# Altium PCB AMP_V1.1.PcbDoc
Units mil, origin at the board's own origin, x right, y up, seen from the top; angles counter-clockwise.
Board outline 3630 x 2630 mil, 4 copper layers (Top Layer, Layer 1, Layer 2, Bottom Layer), stack 22.378 mil thick; 118 components, 78 nets, 320 pads, 437 vias.
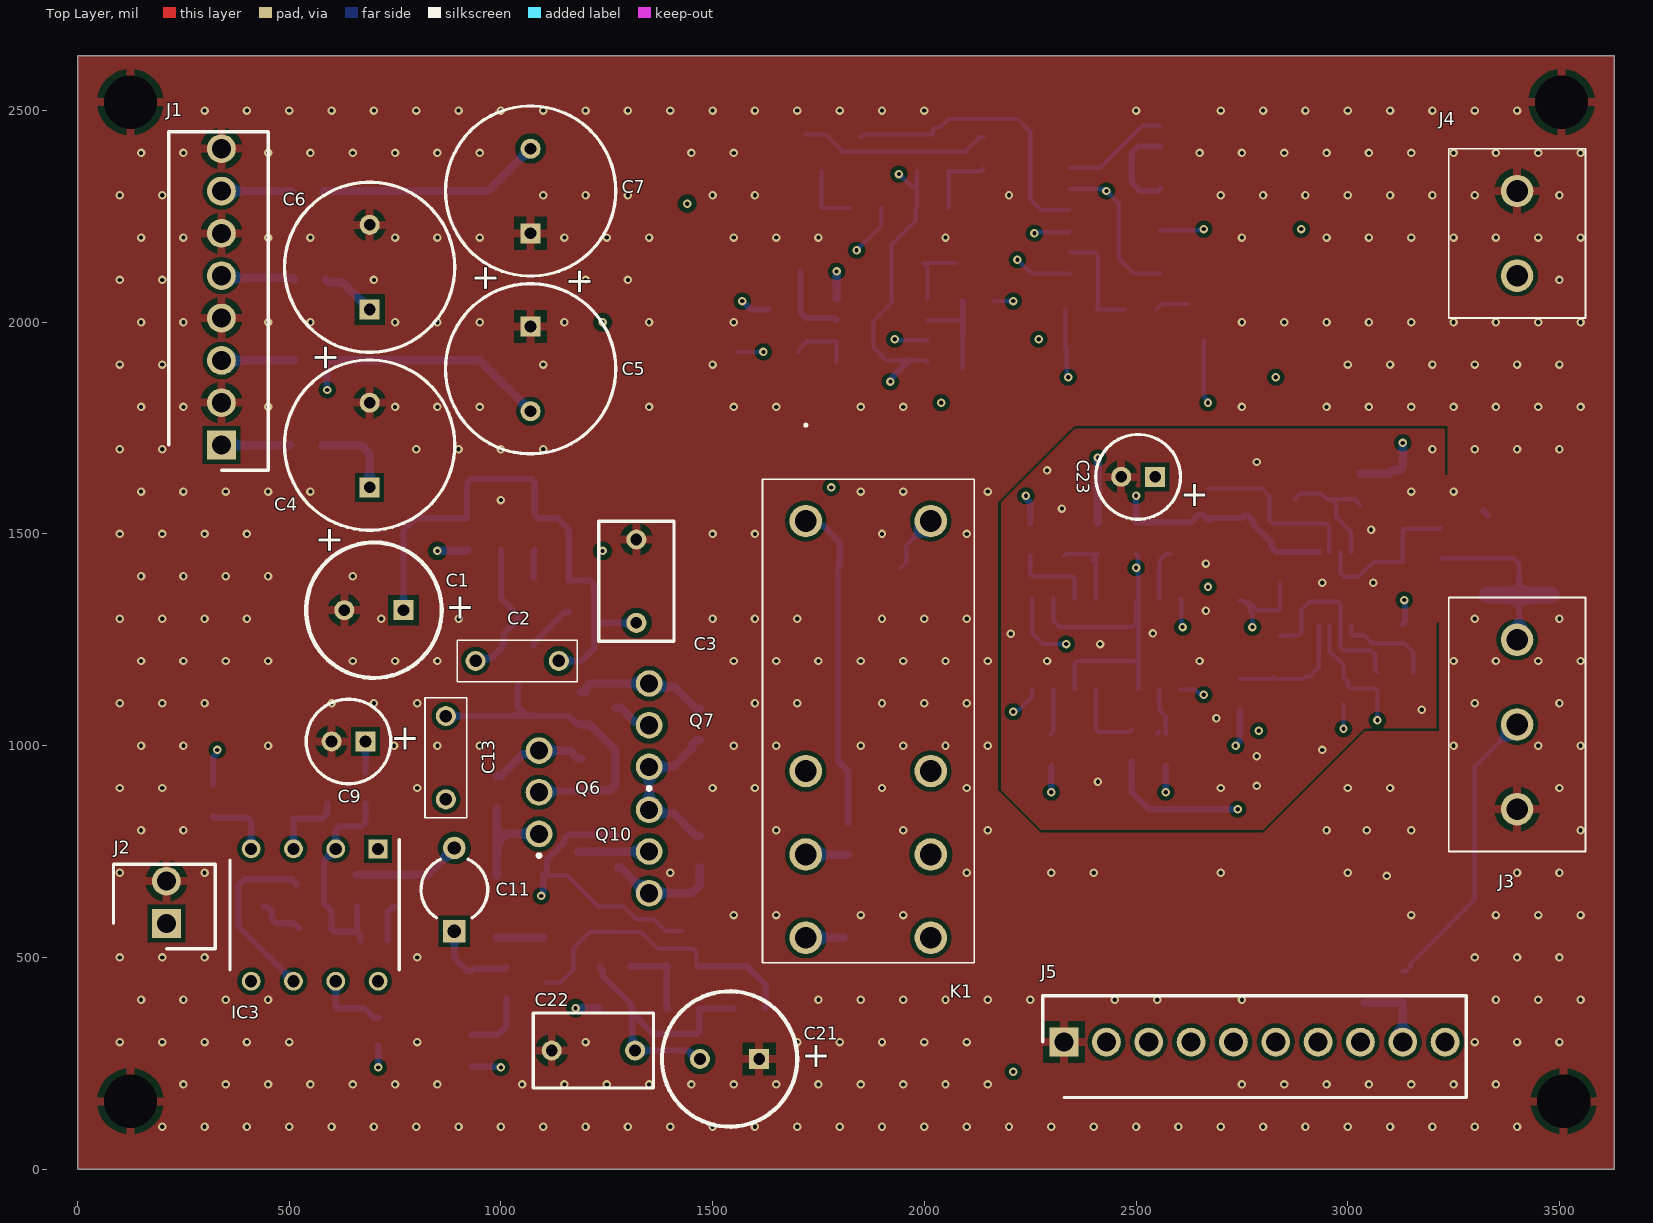
[diagram p0: Top Layer view]
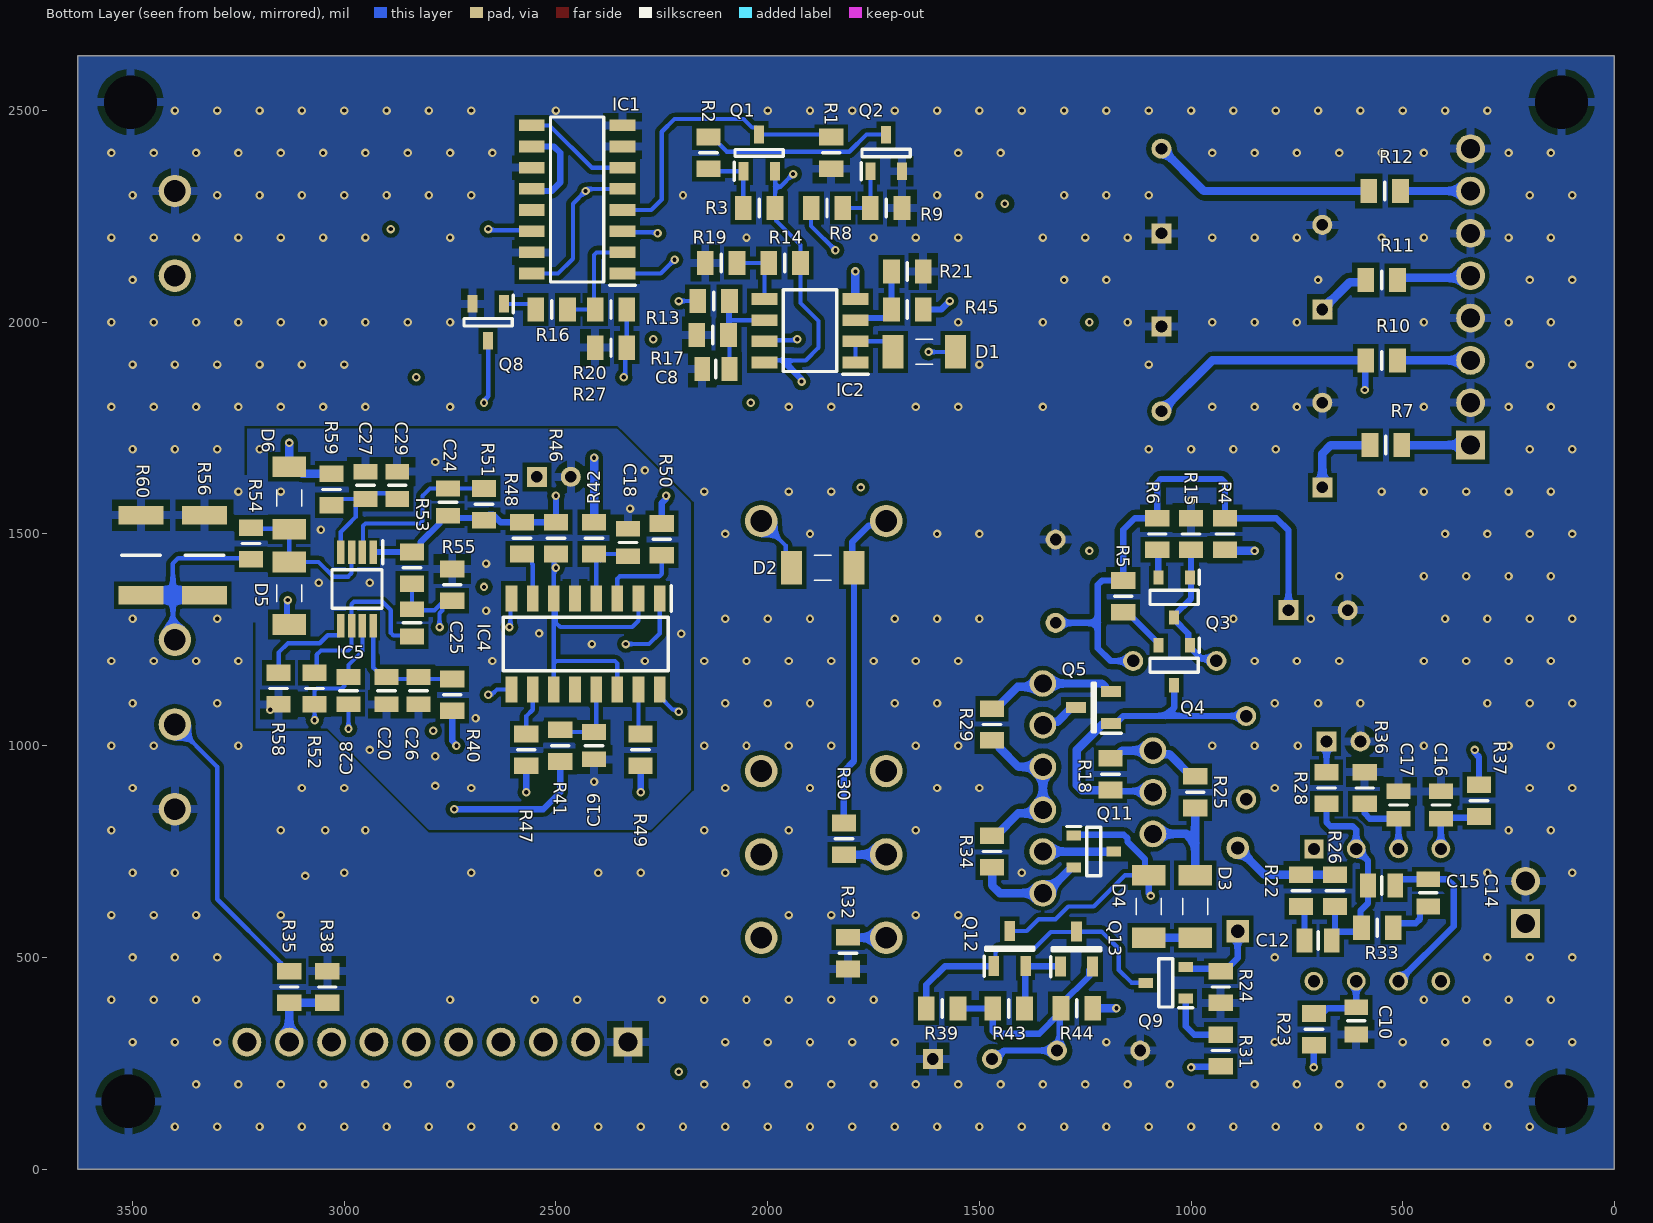
[diagram p1: Bottom Layer view, seen from below]
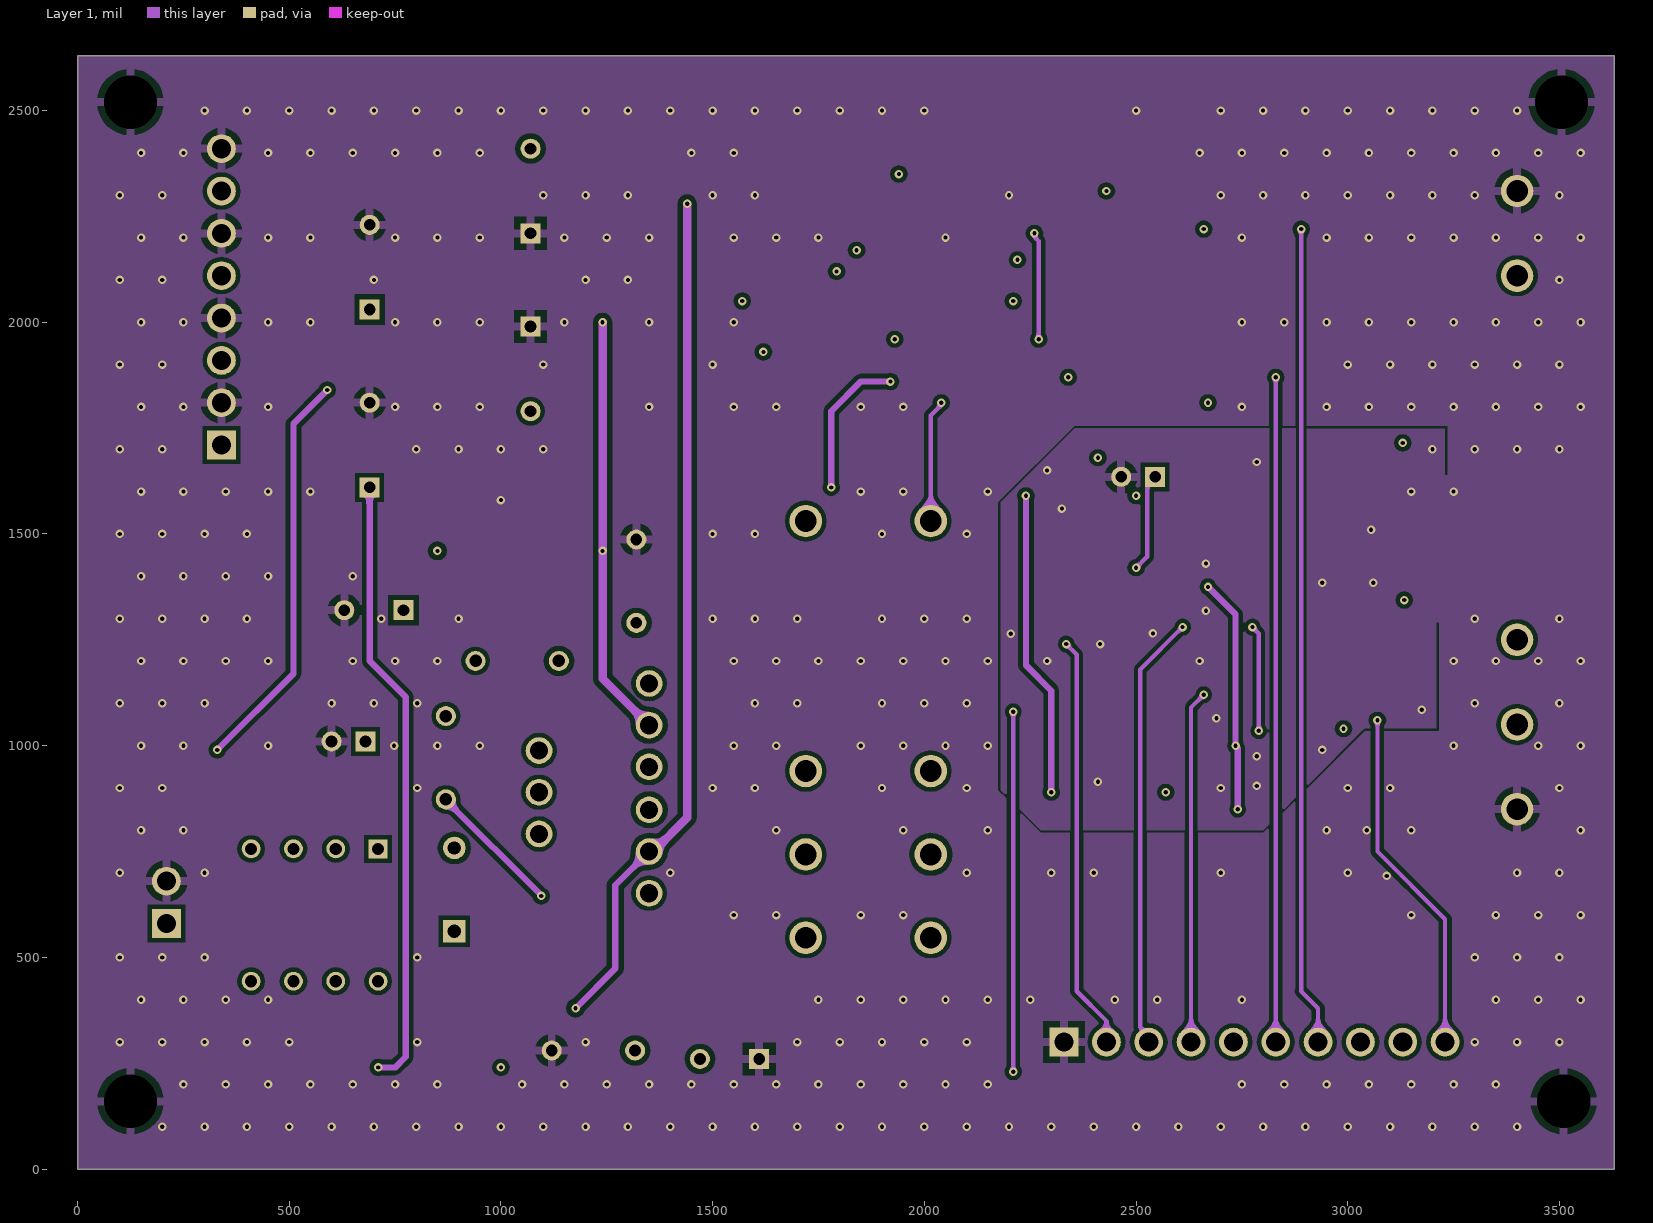
[diagram p2: Layer 1]
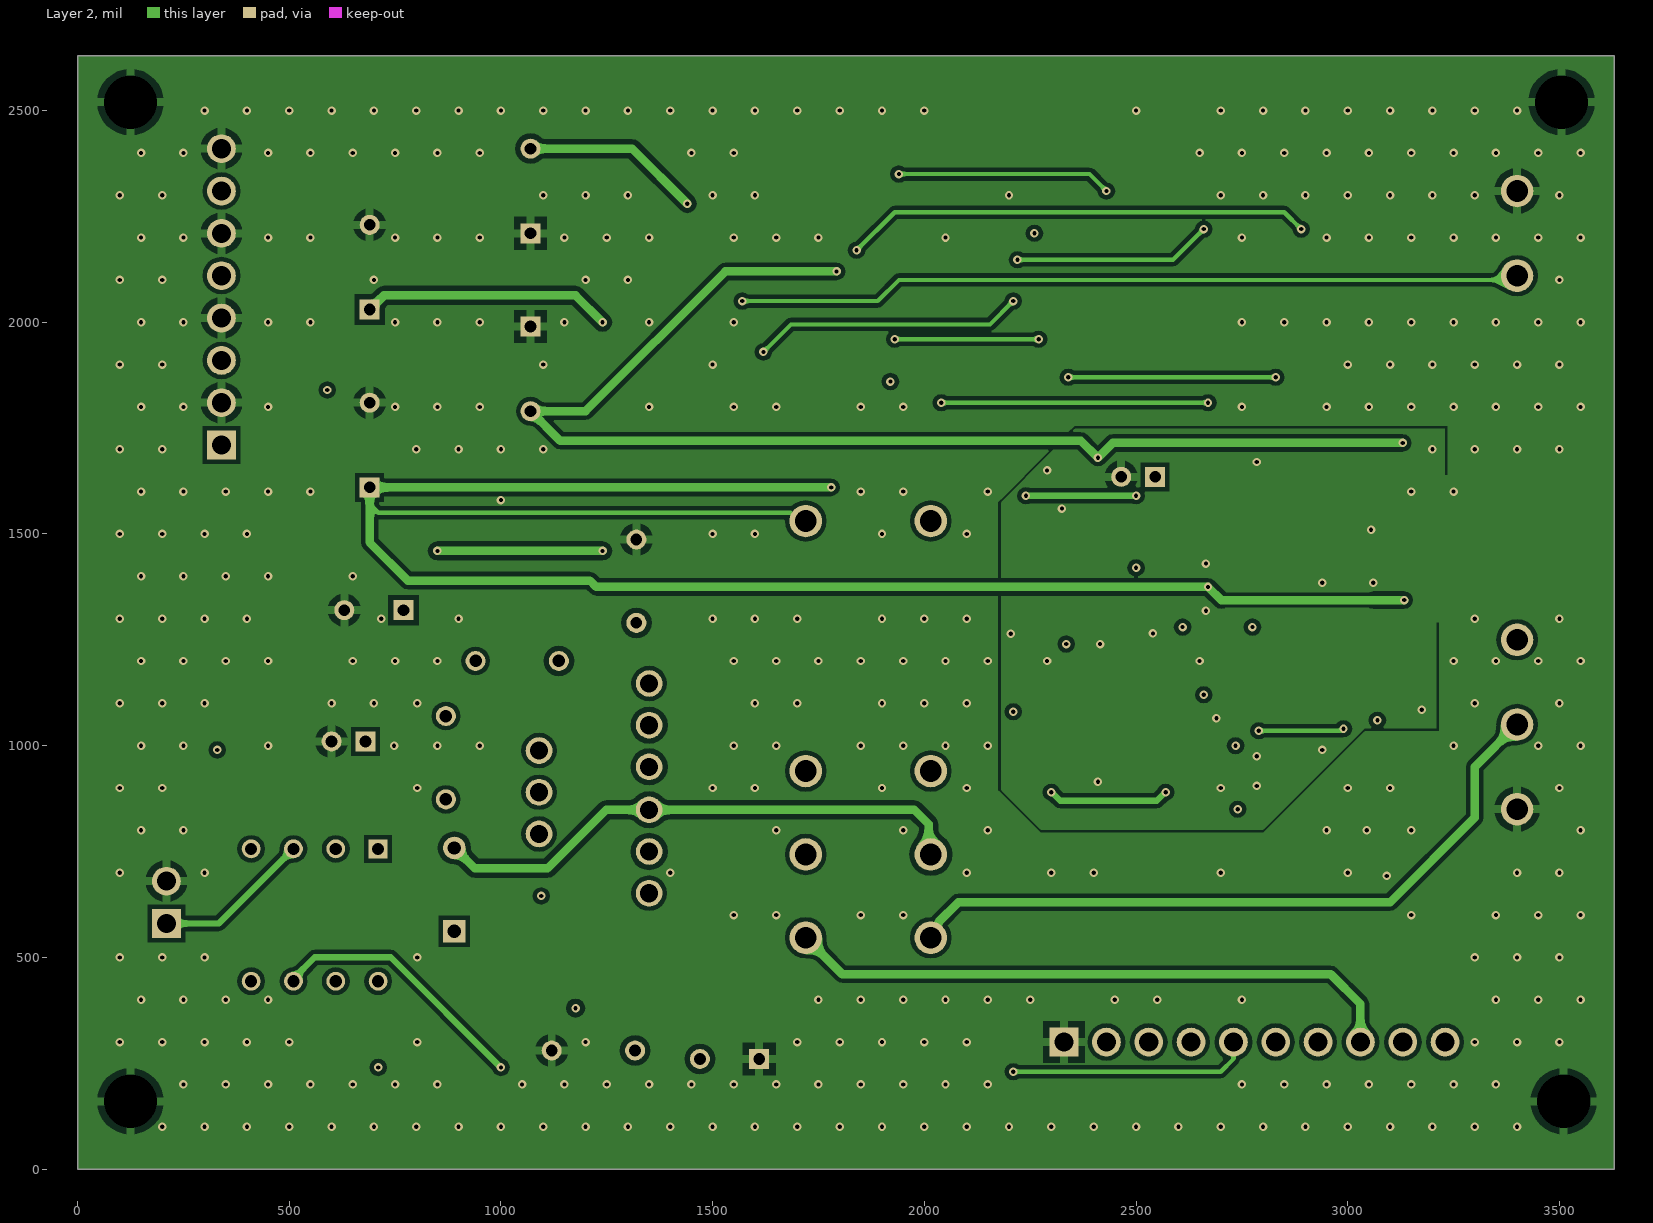
[diagram p3: Layer 2]
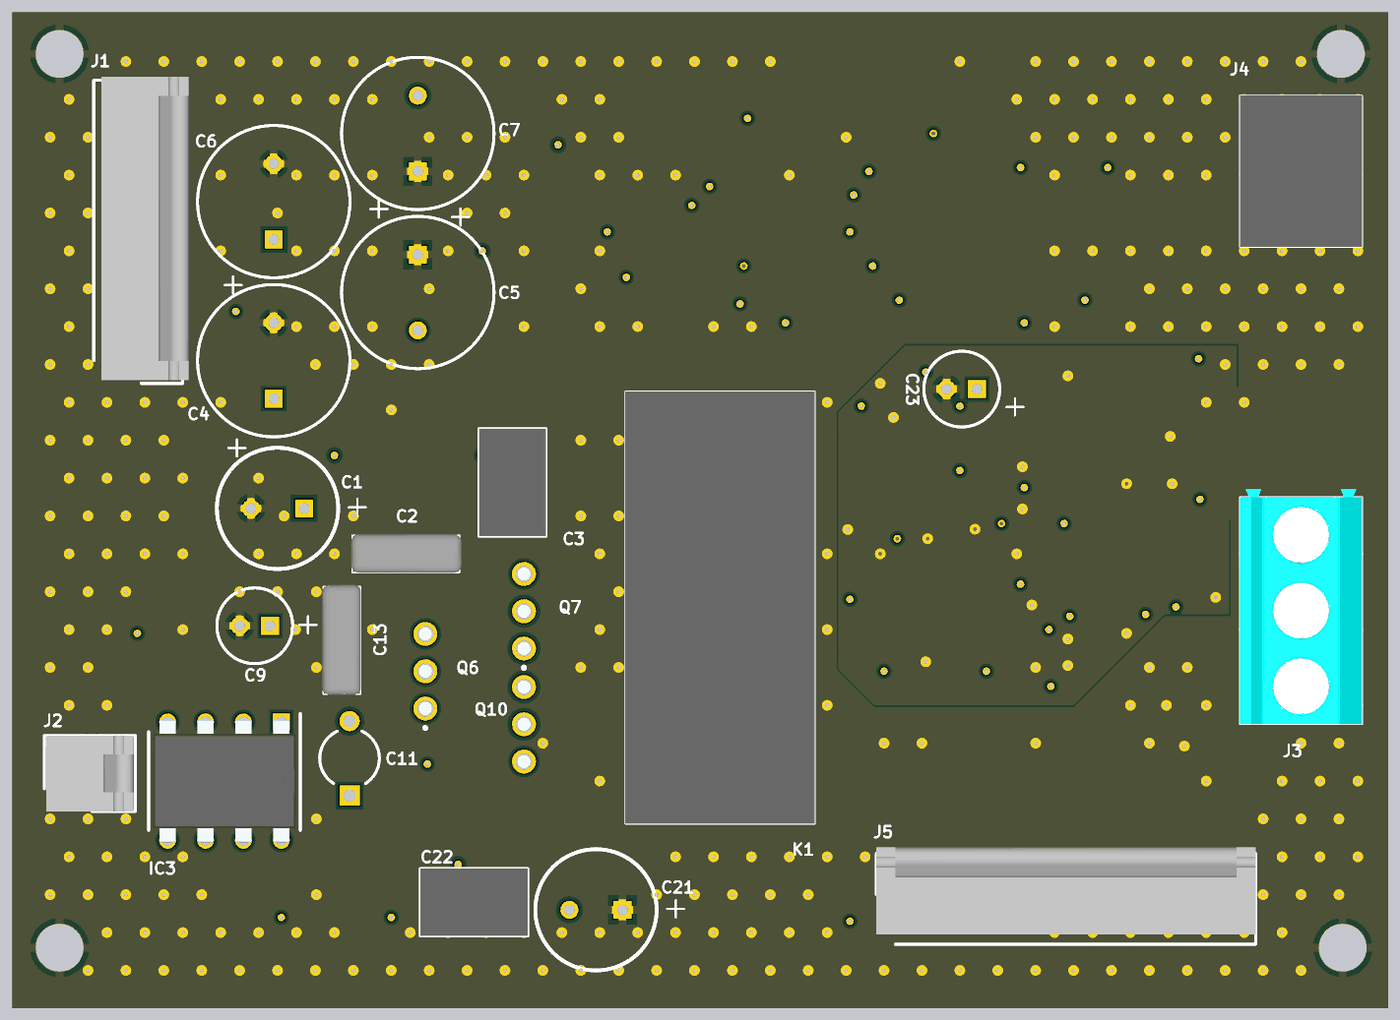
[diagram p4: 3D render of the assembled board from above, using the file's embedded part models]
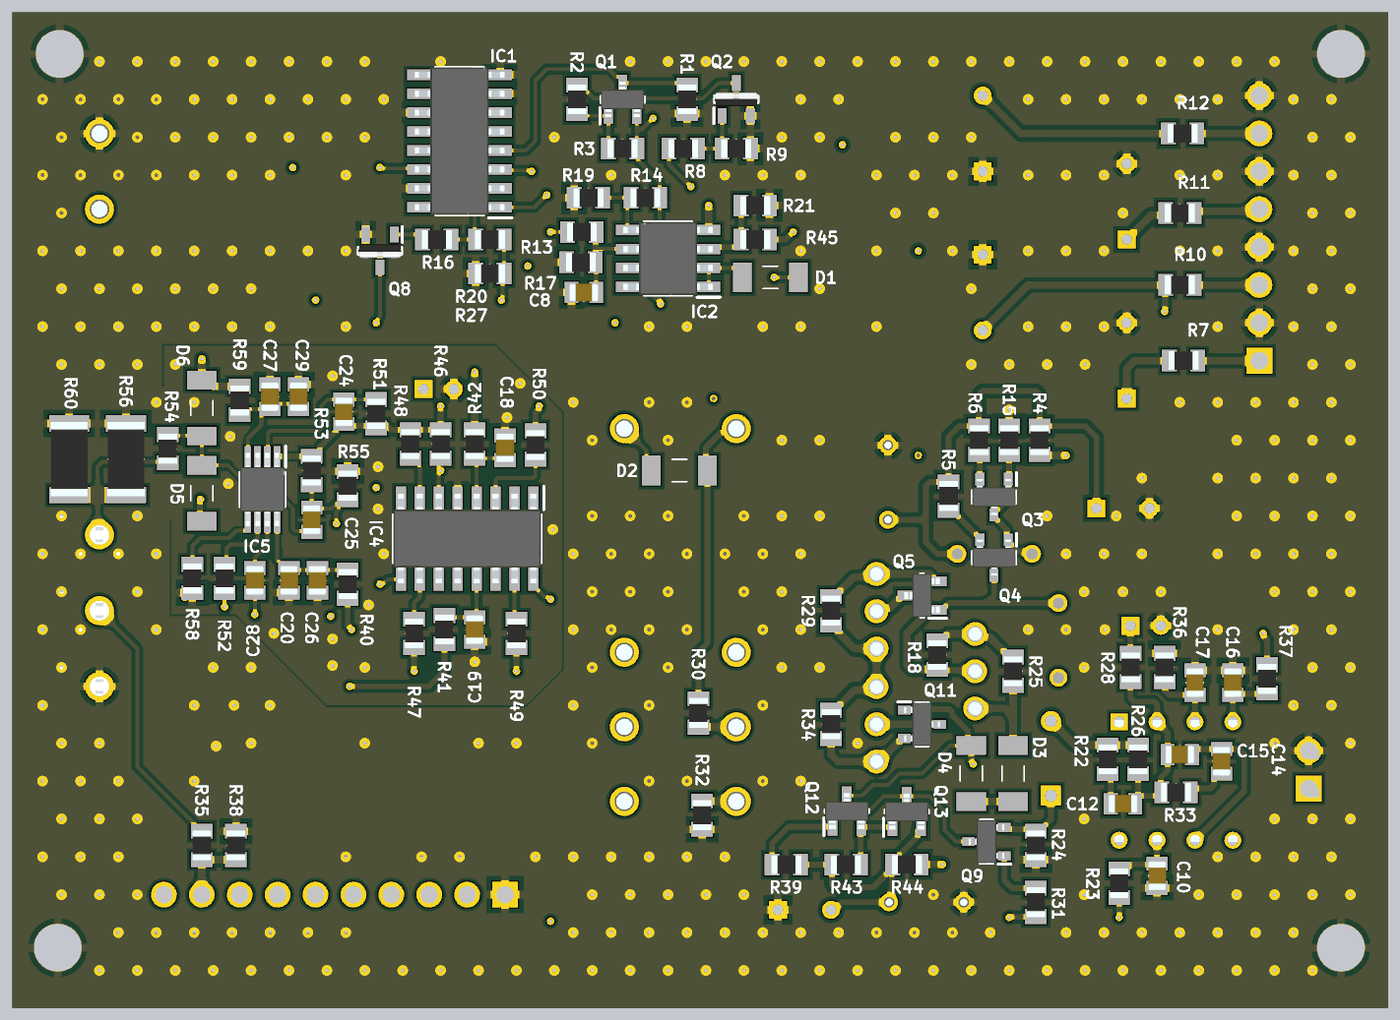
[diagram p5: 3D render of the assembled board from below, using the file's embedded part models]

## Layer stack, top to bottom
Top Solder: solder mask 0.4, Solder Resist, Dk 3.5
Top Layer: signal copper 1.4
Dielectric 2: prepreg 2.8, PP-006, Dk 4.1
Layer 1: signal copper 0.689
Dielectric 1: dielectric 12.6, FR-4, Dk 4.8
Layer 2: signal copper 0.689
Dielectric 3: prepreg 2.8, PP-006, Dk 4.1
Bottom Layer: signal copper 1.4
Bottom Solder: solder mask 0.4, Solder Resist, Dk 3.5

## Board outline
0,0 3630,0 3630,2630 0,2630

## Design rules (kind name [scope] priority, off if disabled: settings)
Clearance Clearance_Room_IC5 [TouchesRoom('Room_IC5')] p1: gap=7 ignorepadtopadclearanceinfootprint=FALSE
Clearance Clearance_HiVoltage [InNetClass('HiVoltage')] p2: gap=12 ignorepadtopadclearanceinfootprint=FALSE
Clearance [All] p3: gap=10 ignorepadtopadclearanceinfootprint=FALSE except(0: Arc-Hole Track-Hole SMDPad-Hole THPad-Hole Via-Hole Fill-Hole Poly-Hole Region-Hole Text-Hole)
ComponentClearance [All] p1 off: gap=10 collisioncheckmode=3 verticalgap=10 showdistances=FALSE
PlaneConnect PlaneConnect_GND [InNet('GND')] p1: pad.planeconnectstyle=Relief pad.reliefexpansion=20 pad.reliefentries=4 pad.reliefconductorwidth=10 pad.reliefairgap=10 via.planeconnectstyle=Direct via.reliefexpansion=20 via.reliefentries=4 via.reliefconductorwidth=10 via.reliefairgap=10
PlaneConnect [All] p2: planeconnectstyle=Relief reliefexpansion=20 reliefentries=4 reliefconductorwidth=10 reliefairgap=10
PolygonConnect PolygonConnect_GND [All] p1: thpad.connectstyle=Relief thpad.reliefconductorwidth=20 thpad.reliefentries=4 thpad.polygonreliefangle="90 Angle" thpad.airgapwidth=15 smdpad.connectstyle=Relief smdpad.reliefconductorwidth=20 smdpad.reliefentries=4 smdpad.polygonreliefangle="90 Angle" smdpad.airgapwidth=15 via.connectstyle=Direct via.reliefconductorwidth=20 via.reliefentries=4 via.polygonreliefangle="90 Angle" via.airgapwidth=15
PolygonConnect [All] p2: connectstyle=Relief reliefconductorwidth=20 reliefentries=4 polygonreliefangle="90 Angle" airgapwidth=15
RoomDefinition Room_IC5 [False] p1: confinementstyle=ConfineIn formatcopy=TRUE lockcomponents=FALSE outline 2880,1520 3060,1520 3060,1210 2880,1210
RoutingVias [All] p1: holewidth=20 width=40 viastyle="Through Hole" minholewidth=7.87 minwidth=15.75 maxholewidth=28 maxwidth=50
SolderMaskExpansion [All] p1: expansion=4 istentingtop=FALSE
Width [All] p1: maxlimit=100 minlimit=10 preferedwidth=20
28 further rules are at their usual default settings.

## Classes and differential pairs
net class HiVoltage: +50 -50 NetC1_1 NetC11_2 NetC21_2 NetK1_12 NetK1_22

## Components (designator, comment, footprint, x,y, rotation, side; value= is the part's Value field where it differs from the comment)
C1 "Capacitor Electrolytic" CAP_EL_8X12R3_5 700,1320 r0 top value=10u
C2 "Capacitor Film" R82EC2470DQ60J 940,1200 r0 top value=220n
C3 "Capacitor Film" R82DC3680AA60J 1320,1486.85 r270 top value=680n
C4 "Capacitor Electrolytic" CAP_EL_10X16XR5 690,1710 r270 top value=100u
C5 "Capacitor Electrolytic" CAP_EL_10X16XR5 1070,1890 r90 top value=100u
C6 "Capacitor Electrolytic" CAP_EL_10X16XR5 690,2130 r270 top value=220u
C7 "Capacitor Electrolytic" CAP_EL_10X16XR5 1070,2310 r270 top value=220u
C8 "Capacitor SMD" CAPC2012X140N 2122.28,1890 r0 bottom value=10n
C9 "Capacitor Electrolytic" CAP_EL_5X7XR2 640,1010 r0 top value=10u
C10 "Capacitor_SMD" CAPC2012X140N 610,350 r270 bottom value=100n
C11 "Cap2" CAPR5-4X5 890,660 r90 top value=4p
C12 "Capacitor_SMD" CAPC2012X140N 700,540 r0 bottom value=100p
C13 "Cap Polyester THT" R82EC2470DQ60J 870,873.15 r90 top value=680n
C14 "Capacitor_SMD" CAPC2012X140N 440,652.28 r90 bottom value=1n
C15 "Capacitor_SMD" CAPC2012X140N 550,670 r180 bottom value=10p
C16 "Capacitor_SMD" CAPC2012X140N 410,860 r270 bottom value=100n
C17 "Capacitor_SMD" CAPC2012X140N 510,860 r270 bottom value=10p
C18 "Capacitor_SMD" CAPC2012X140N 2330,1480 r90 bottom value=100n
C19 "Capacitor_SMD" CAPC2012X140N 2410,1000 r270 bottom value=100n
C20 "Capacitor_SMD" CAPC2012X140N 2900,1130 r270 bottom value=100n
C21 "Capacitor Electrolytic" CAP_EL_8X12R3_5 1540,260 r0 top value=10u
C22 "Capacitor Film" R82DC3680AA60J 1120,280 r0 top value=680n
C23 "Capacitor Electrolytic" CAP_EL_5X7XR2 2505,1635 r0 top value=10u
C24 "Capacitor SMD" CAPC2012X140N 2755,1575 r270 bottom value=10n
C25 "Capacitor SMD" CAPC2012X140N 2840,1290 r90 bottom value=10n
C26 "Capacitor_SMD" CAPC2012X140N 2825,1130 r270 bottom value=10u
C27 "Capacitor_SMD" CAPC2012X140N 2950,1615 r90 bottom value=100n
C28 "Capacitor SMD" CAPC2012X140N 2990,1130 r270 bottom value=10n
C29 "Capacitor_SMD" CAPC2012X140N 2875,1615 r90 bottom value=10u
D1 "1N4148BUR" 1N4148BUR 1630,1930 r0 bottom
D2 "1N4148BUR" 1N4148BUR 1870,1420 r0 bottom
D3 "1N4148BUR" 1N4148BUR 990,620 r90 bottom
D4 "1N4148BUR" 1N4148BUR 1100,620 r270 bottom
D5 "1N4148BUR" 1N4148BUR 3130,1360 r90 bottom
D6 "1N4148BUR" 1N4148BUR 3130,1585 r90 bottom
IC1 "HEF4043BT,652" SOIC127P600X175-16N 2450,2290 r0 bottom
IC2 "LM258AWYPT" SOIC127P600X175-8N 1900,1980 r0 bottom
IC3 "LM741CN_NOPB" DIP794W53P254L959H508Q8N 560,600 r270 top
IC4 "DG442DY-E3" SOIC127P600X175-16N 2430,1240 r270 bottom
IC5 "AZ4580" SOP65P490X110-8N 2970,1370 r270 bottom
J1 "640456-8" SHDR8W66P0X254_1X8_2032X572X1024P 340,1710 r270 top
J2 "640456-2" SHDR2W66P0X254_1X2_508X572X1041P 210,580 r270 top
J3 "Terminal Block" TB00650803BE 3400,850 r90 top
J4 "TB006-508-02BE" TB00650802BE 3400,2210 r90 top
J5 "1-640456-0" SHDR10W66P0X254_1X10_2540X572X1041P 2330,300 r0 top
K1 "RM84-2012-35-1005" RM842012351005 1720,1530.55 r90 top
Q1 "BC856A-T" SOT95P240X115-3N 2020,2400 r90 bottom
Q2 "BC846" SOT95P230X110-3N 1720,2400 r90 bottom
Q3 "MMBT5401-7-F" SOT95P240X120-3N 1040,1350 r270 bottom
Q4 "MMBT5401-7-F" SOT95P240X120-3N 1040,1190 r270 bottom
Q5 "MMBT5551-7-F" SOT96P240X110-3N 1230,1090 r0 bottom
Q6 "BF422-AP" BF422AP 1090,791.57 r90 top
Q7 "BF422-AP" BF422AP 1350,950 r90 top
Q8 "BC846" SOT95P230X110-3N 2660,2000 r270 bottom
Q9 "MMBT5401-7-F" SOT95P240X120-3N 1060,440 r0 bottom
Q10 "BF423-AP" BF422AP 1350,848.43 r270 top
Q11 "MMBT5401-7-F" SOT95P240X120-3N 1230,750 r180 bottom
Q12 "MMBT5551-7-F" SOT96P240X110-3N 1428.42,520.72 r90 bottom
Q13 "MMBT5551-7-F" SOT96P240X110-3N 1270.62,519.38 r90 bottom
R1 "Res_SMD" RESC2012X60N 1850,2400 r90 bottom value=1k
R2 "Res_SMD" RESC2012X60N 2140,2400 r270 bottom value=1k
R3 "Res_SMD" RESC2012X60N 2020,2270 r180 bottom value=1k
R4 "Res_SMD" RESC2012X60N 920,1500 r90 bottom value=1k
R5 "Res_SMD" RESC2012X60N 1160,1352.6 r90 bottom value=1k
R6 "Res_SMD" RESC2012X60N 1080,1500 r90 bottom value=1k
R7 "Res_SMD" RESC2012X60N 540,1710 r180 bottom value=1k
R8 "Res_SMD" RESC2012X60N 1860,2270 r180 bottom value=1k
R9 "Res_SMD" RESC2012X60N 1720,2270 r180 bottom value=1k
R10 "Res_SMD" RESC2012X60N 550,1910 r180 bottom value=1k
R11 "Res_SMD" RESC2012X60N 550,2100 r180 bottom value=1k
R12 "Res_SMD" RESC2012X60N 542.6,2310 r180 bottom value=1k
R13 "Res_SMD" RESC2012X60N 2127.4,2050 r180 bottom value=1k
R14 "Res_SMD" RESC2012X60N 1960,2140 r0 bottom value=1k
R15 "Res_SMD" RESC2012X60N 1000,1500 r270 bottom value=1k
R16 "Res_SMD" RESC2012X60N 2510,2030 r180 bottom value=1k
R17 "Res_SMD" RESC2012X60N 2130,1970 r0 bottom value=1k
R18 "Res_SMD" RESC2012X60N 1190,932.6 r270 bottom value=1k
R19 "Res_SMD" RESC2012X60N 2110,2140 r0 bottom value=1k
R20 "Res_SMD" RESC2012X60N 2370,2030 r0 bottom value=1k
R21 "Res_SMD" RESC2012X60N 1670,2120 r180 bottom value=1k
R22 "Res_SMD" RESC2012X60N 740,657.4 r90 bottom value=1k
R23 "Res_SMD" RESC2012X60N 710,330 r270 bottom value=1k
R24 "Res_SMD" RESC2012X60N 930,430 r270 bottom value=1k
R25 "Res_SMD" RESC2012X60N 990,890 r90 bottom value=1k
R26 "Res_SMD" RESC2012X60N 660,657.4 r90 bottom value=1k
R27 "Res_SMD" RESC2012X60N 2370,1940 r180 bottom value=1k
R28 "Res_SMD" RESC2012X60N 680,900 r90 bottom value=1k
R29 "Res_SMD" RESC2012X60N 1470,1050 r90 bottom value=1k
R30 "Res_SMD" RESC2012X60N 1820,780 r270 bottom value=1k
R31 "Res_SMD" RESC2012X60N 930,280 r270 bottom value=1k
R32 "Res_SMD" RESC2012X60N 1810,510 r270 bottom value=1k
R33 "Res_SMD" RESC2012X60N 560,570 r0 bottom value=1k
R34 "Res_SMD" RESC2012X60N 1470,750 r90 bottom value=1k
R35 "Res_SMD" RESC2012X60N 3130,430 r270 bottom value=1k
R36 "Res_SMD" RESC2012X60N 590,900 r270 bottom value=1k
R37 "Res_SMD" RESC2012X60N 320,870 r270 bottom value=1k
R38 "Res_SMD" RESC2012X60N 3040,430 r90 bottom value=1k
R39 "Res_SMD" RESC2012X60N 1588.02,379.38 r0 bottom value=1k
R40 "Res_SMD" RESC2012X60N 2745,1120 r90 bottom value=1k
R41 "Res_SMD" RESC2012X60N 2490,1000 r270 bottom value=1k
R42 "Res_SMD" RESC2012X60N 2410,1490 r90 bottom value=1k
R43 "Res_SMD" RESC2012X60N 1430.62,379.38 r180 bottom value=1k
R44 "Res_SMD" RESC2012X60N 1270,380 r0 bottom value=1k
R45 "Res_SMD" RESC2012X60N 1670,2030 r180 bottom value=1k
R46 "Res_SMD" RESC2012X60N 2500,1490 r90 bottom value=1k
R47 "Res_SMD" RESC2012X60N 2570,990 r270 bottom value=1k
R48 "Res_SMD" RESC2012X60N 2580,1490 r90 bottom value=1k
R49 "Res_SMD" RESC2012X60N 2300,990 r270 bottom value=1k
R50 "Res_SMD" RESC2012X60N 2250,1487.4 r90 bottom value=1k
R51 "Res_SMD" RESC2012X60N 2670,1570 r90 bottom value=1k
R52 "Res_SMD" RESC2012X60N 3070,1135 r90 bottom value=1k
R53 "Res_SMD" RESC2012X60N 2840,1420 r270 bottom value=1k
R54 "Res_SMD" RESC2012X60N 3220,1477.6 r90 bottom value=1k
R55 "Res_SMD" RESC2012X60N 2745,1380 r270 bottom value=1k
R56 "Res_SMD" RESC5025X65N 3330,1450 r270 bottom value=1k
R58 "Res_SMD" RESC2012X60N 3155,1135 r90 bottom value=1k
R59 "Res_SMD" RESC2012X60N 3030,1605 r90 bottom value=1k
R60 "Res_SMD" RESC5025X65N 3480,1450 r270 bottom value=1k

## Footprints (in the part's own frame and the unit in brackets; to place one, negate y for a bottom-side part, rotate by r counter-clockwise, add the part's x,y. Pads: shape width x height; smd on the part's side, far side on the other; paste and mask are expansions set on the pad)
1N4148BUR [mm]
  rect 1.25x2 smd: 1(-1.875,0) 2(1.875,0)
  silkscreen extent -0.5,-0.75 0.5,0.75
BF422AP [mm]
  round 1.6 hole 1.09: 1(0,0) 2(2.5,0) 3(5,0)
  silkscreen extent -1.4,-0.1 -1.2,0.1, body extent -0.44,-0.44 5.45,0.44, height 0.1
CAP_EL_5X7XR2 [mm] "Electrolytic capacitor D5 H7 Raster 2mm"
  rect 1.2x1.2 hole 0.7: 1(1.016,0)
  round 1.2 hole 0.7: 2(-1.016,0)
  silkscreen extent -2.54,-2.54 2.54,2.54
CAP_EL_8X12R3_5 [mm] "Electrolytic capacitor D8 H12 Raster 3.5mm"
  rect 1.2x1.2 hole 0.7: 1(1.778,0)
  round 1.2 hole 0.7: 2(-1.778,0)
  silkscreen extent -4.06,-4.06 4.06,4.06
CAP_EL_10X16XR5 [mm] "Electrolytic capacitor D10 H16 Raster 5mm"
  rect 1.2x1.2 hole 0.7: 1(2.54,0)
  round 1.2 hole 0.7: 2(-2.54,0)
  silkscreen extent -5.1,-5.11 5.1,5.11
CAPC2012X140N [mm]
  rect 0.94x1.43 smd: 1(-0.82,0) 2(0.82,0)
  silkscreen extent 0,-0.53 0,0.53, body extent -1,-0.63 1,0.63, height 1.4
CAPR5-4X5 [mm] "Capacitor; 2 Leads"
  rect 1.35x1.35 hole 0.8: 1(-2.5,0)
  round 1.35 hole 0.8: 2(2.5,0)
  silkscreen extent -1.69,-2 1.82,2
DIP794W53P254L959H508Q8N [mm]
  rect 1.13x1.13 hole 0.73: 1(-3.97,3.81)
  round 1.13 hole 0.73: 2(-3.97,1.27) 3(-3.97,-1.27) 4(-3.97,-3.81) 5(3.97,-3.81) 6(3.97,-1.27) 7(3.97,1.27) 8(3.97,3.81)
  silkscreen extent -4.53,-5.08 3.3,5.08, body extent -4.1,-4.79 4.1,4.79, height 5.08
R82DC3680AA60J [mm]
  round 1.2 hole 0.7: 1(0,0) 2(5,0)
  silkscreen extent -1.1,-2.25 6.1,2.25, body extent -1.1,-2.25 6.1,2.25, height 9.7
R82EC2470DQ60J [mm]
  round 1.2 hole 0.75: 1(0,0) 2(5,0)
  silkscreen extent -1.1,-1.25 6.1,1.25, body extent -1.16,-1.27 6.24,1.33, height 6.11
RESC2012X60N [mm]
  rect 1x1.45 smd: 1(-0.95,0) 2(0.95,0)
  silkscreen extent 0,-0.53 0,0.53, body extent -1,-0.63 1,0.63, height 0.6
RESC5025X65N [mm]
  rect 1.1x2.7 smd: 1(-2.4,0) 2(2.4,0)
  silkscreen extent 0,-1.15 0,1.15, body extent -2.5,-1.25 2.5,1.25, height 0.65
RM842012351005 [mm]
  round 1.95 hole 1.3: 11(-20,0) 12(-15,0) 14(-25,0) 21(-20,-7.5) 22(-15,-7.5) 24(-25,-7.5) A1(0,0) A2(0,-7.5)
  silkscreen extent -26.5,-10.1 5.8,2.6, body extent -26.5,-10.1 2.5,2.6, height 15.8
SHDR2W66P0X254_1X2_508X572X1041P [mm]
  rect 1.725x1.725 hole 1.15: 1(0,0)
  round 1.725 hole 1.15: 2(-2.54,0)
  silkscreen extent -3.56,-3.18 1.52,2.92, body extent -3.56,-3.05 1.52,2.79, height 9.88
SHDR8W66P0X254_1X8_2032X572X1024P [mm]
  rect 1.725x1.725 hole 1.15: 1(0,0)
  round 1.725 hole 1.15: 2(-2.54,0) 3(-5.08,0) 4(-7.62,0) 5(-10.16,0) 6(-12.7,0) 7(-15.24,0) 8(-17.78,0)
  silkscreen extent -18.8,-3.17 1.52,2.8, body extent -19.03,-2.65 1.29,3.19, height 10.03
SHDR10W66P0X254_1X10_2540X572X1041P [mm]
  rect 1.725x1.725 hole 1.15: 1(0,0)
  round 1.725 hole 1.15: 2(2.54,0) 3(5.08,0) 4(7.62,0) 5(10.16,0) 6(12.7,0) 7(15.24,0) 8(17.78,0) 9(20.32,0) 10(22.86,0)
  silkscreen extent -1.27,-3.32 24.13,2.77, body extent -1.27,-2.66 24.13,3.18, height 10.03
SOIC127P600X175-8N [mm]
  rect 1.55x0.7 smd: 1(-2.725,1.905) 2(-2.725,0.635) 3(-2.725,-0.635) 4(-2.725,-1.905) 5(2.725,-1.905) 6(2.725,-0.635) 7(2.725,0.635) 8(2.725,1.905)
  silkscreen extent -3.5,-2.45 1.6,2.61, body extent -3,-2.45 3,2.45, height 1.75
SOIC127P600X175-16N [mm]
  rect 1.55x0.7 smd: 1(-2.725,4.445) 2(-2.725,3.175) 3(-2.725,1.905) 4(-2.725,0.635) 5(-2.725,-0.635) 6(-2.725,-1.905) 7(-2.725,-3.175) 8(-2.725,-4.445) 9(2.725,-4.445) 10(2.725,-3.175) 11(2.725,-1.905) 12(2.725,-0.635) 13(2.725,0.635) 14(2.725,1.905) 15(2.725,3.175) 16(2.725,4.445)
  silkscreen extent -3.5,-4.95 1.6,5.15, body extent -3,-4.95 3,4.95, height 1.75
SOP65P490X110-8N [mm]
  rect 1.4x0.45 smd: 1(-2.2,0.975) 2(-2.2,0.325) 3(-2.2,-0.325) 4(-2.2,-0.975) 5(2.2,-0.975) 6(2.2,-0.325) 7(2.2,0.325) 8(2.2,0.975)
  silkscreen extent -2.9,-1.5 1.15,1.55, body extent -2.45,-1.5 2.45,1.5, height 1.1
SOT95P230X110-3N [mm]
  rect 1.05x0.6 smd: 1(-1.1,0.95) 2(-1.1,-0.95) 3(1.1,0)
  silkscreen extent -1.63,-1.45 0.23,1.5, body extent -0.45,-1.45 0.5,1.45, height 3.31
SOT95P240X115-3N [mm]
  rect 1.1x0.6 smd: 1(-1.1,0.95) 2(-1.1,-0.95) 3(1.1,0)
  silkscreen extent -1.65,-1.45 0.2,1.5, body extent -1.2,-1.45 1.2,1.45, height 1.15
SOT95P240X120-3N [mm]
  rect 0.85x0.6 smd: 1(-1.2,0.95) 2(-1.2,-0.95) 3(1.2,0)
  silkscreen extent -1.63,-1.45 0.43,1.5, body extent -1.2,-1.45 1.2,1.45, height 1.2
SOT96P240X110-3N [mm]
  rect 1.2x0.65 smd: 1(-1.05,0.96) 2(-1.05,-0.96) 3(1.05,0)
  silkscreen extent -1.65,-1.45 0.1,1.54, body extent -1.2,-1.45 1.2,1.45, height 1.1
TB00650802BE [mm]
  round 1.95 hole 1.3: 1(-2.54,0) 2(2.54,0)
  silkscreen extent -5.08,-4.1 5.08,4.1, body extent -5.08,-4.1 5.08,4.1, height 10.5
TB00650803BE [mm]
  round 1.95 hole 1.3: 1(0,0) 2(5.08,0) 3(10.16,0)
  silkscreen extent -2.54,-4.1 12.7,4.1, body extent -2.54,-4.1 13.2,4.1, height 10

## Part data
C1 C4 C5 C6 C7 C9 C21 C23: "Capacitor polarized electrolytic", Manufacturer_Name=TDK, Manufacturer_Part_Number=B43640A9477M, Mouser Part Number=871-B43640A9477M, Datasheet Link=https://componentsearchengine.com/Datasheets/1/B43640A9477M.pdf, Height=52mm
C2 C3 C13 C22: "Film polyester capacitor", Arrow Part Number=R82DC3680AA60J, Manufacturer_Name=Kemet, Mouser Part Number=80-R82DC3680AA60J, Arrow Price/Stock=https://www.arrow.com/en/products/r82dc3680aa60j/kemet-corporation, Datasheet Link=https://www.kemet.com/specsheet/R82DC3680AA60J, Height=9.6mm, Manufacturer_Part_Number=R82DC3680AA60J, Mouser Price/Stock=https://www.mouser.com/Search/Refine.aspx?Keyword=80-R82DC3680AA60J
C8 C10 C12 C14 C15 C16 C17 C18 C19 C20 C24 C25 C26 C27 C28 C29: "Capacitor smd ceramic", Manufacturer_Name=TDK, Manufacturer_Part_Number=C3216C0G1H562J060AA, Datasheet Link=https://product.tdk.com/info/en/catalog/datasheets/mlcc_commercial_midvoltage_en.pdf, Height=0.75mm
C11: "Capacitor", PackageDescription="Capacitor; 2 Leads", PackageReference=CAPR5-4X5, Published=23-Sep-2002, Publisher="Altium Limited"
D1 D2 D3 D4 D5 D6: "Diode", Manufacturer_Name=Vishay, Mouser Part Number=1n4148, Datasheet Link=https://www.mouser.com/datasheet/2/427/ll4148-1767723.pdf, Height=1.6mm, Manufacturer_Part_Number=1N4148BUR
IC1: "Integrated Circuit", Manufacturer_Name=Nexperia, Mouser Part Number=771-HEF4043BT652, Arrow Part Number=HEF4043BT,652, Arrow Price/Stock=https://www.arrow.com/en/products/hef4043bt652/nexperia, Datasheet Link=https://assets.nexperia.com/documents/data-sheet/HEF4043B.pdf, Height=1.75mm, Manufacturer_Part_Number=HEF4043BT,652, Mouser Price/Stock=https://www.mouser.com/Search/Refine.aspx?Keyword=771-HEF4043BT652
IC2: "GP operational amplifier GND included", Manufacturer_Name=STMicroelectronics, Mouser Part Number=511-LM258AWYPT, Arrow Part Number=LM258AWYPT, Arrow Price/Stock=https://www.arrow.com/en/products/lm258awypt/stmicroelectronics, Datasheet Link=https://www.st.com/resource/en/datasheet/lm158w.pdf, Height=1.2mm, Manufacturer_Part_Number=LM258AWYPT, Mouser Price/Stock=https://www.mouser.com/Search/Refine.aspx?Keyword=511-LM258AWYPT
IC3: "Integrated Circuit", Arrow Part Number=LM741CN/NOPB, Manufacturer_Name="Texas Instruments", Mouser Part Number=926-LM741CN/NOPB, Arrow Price/Stock=https://www.arrow.com/en/products/lm741cnnopb/texas-instruments?region=nac, Datasheet Link=http://docs-emea.rs-online.com/webdocs/1230/0900766b81230d6c.pdf, Height=5.08mm, Manufacturer_Part_Number=LM741CN/NOPB, Mouser Price/Stock=https://www.mouser.co.uk/ProductDetail/Texas-Instruments/LM741CN-NOPB?qs=QbsRYf82W3Gt6%252BDX6%252BuAjw%3D%3D
IC4: "Integrated Circuit", Manufacturer_Name=Vishay, Mouser Part Number=781-DG442DY-E3, Arrow Part Number=DG442DY-E3, Arrow Price/Stock=https://www.arrow.com/en/products/dg442dy-e3/vishay, Datasheet Link=http://www.vishay.com/docs/70053/dg441.pdf, Height=1.75mm, Manufacturer_Part_Number=DG442DY-E3, Mouser Price/Stock=https://www.mouser.com/Search/Refine.aspx?Keyword=781-DG442DY-E3
IC5: "Operational amplifier", Arrow Part Number=AZ4580
J1: "Connector", Manufacturer_Name="TE Connectivity", Mouser Part Number=571-6404568, Arrow Part Number=640456-8, Arrow Price/Stock=https://www.arrow.com/en/products/640456-8/te-connectivity, Datasheet Link=http://docs-emea.rs-online.com/webdocs/13e2/0900766b813e2516.pdf, Height=10.236mm, Manufacturer_Part_Number=640456-8, Mouser Price/Stock=https://www.mouser.co.uk/ProductDetail/TE-Connectivity-AMP/640456-8?qs=%2F35zJ5USjomho1287DA4QA%3D%3D, System=Connector
J2: "Connector", Manufacturer_Name="TE Connectivity", Mouser Part Number=571-6404562, Arrow Part Number=640456-2, Arrow Price/Stock=https://www.arrow.com/en/products/640456-2/te-connectivity, Datasheet Link=http://www.te.com/commerce/DocumentDelivery/DDEController?Action=showdoc&DocId=Customer+Drawing%7F640456%7FW3%7Fpdf%7FEnglish%7FENG_CD_640456_W3.pdf%7F640456-2, Height=10.414mm, Manufacturer_Part_Number=640456-2, Mouser Price/Stock=https://www.mouser.co.uk/ProductDetail/TE-Connectivity-AMP/640456-2?qs=%2F35zJ5USjomRu3EJQJgZCQ%3D%3D
J3: "Connector 0.2in 3PIN 1 row", Arrow Part Number=TB006-508-03BE, Manufacturer_Name="CUI Inc.", Mouser Part Number=490-TB006-508-03BE, Arrow Price/Stock=https://www.arrow.com/en/products/tb006-508-03be/cui-devices, Datasheet Link=https://componentsearchengine.com/Datasheets/1/TB006-508-03BE.pdf, Height=10.4mm, Manufacturer_Part_Number=TB006-508-03BE, Mouser Price/Stock=https://www.mouser.co.uk/ProductDetail/CUI-Devices/TB006-508-03BE?qs=vLWxofP3U2zmvvLYJBQLMA%3D%3D
J4: "Connector", Manufacturer_Name="CUI Devices", Mouser Part Number=490-TB006-508-02BE, Arrow Part Number=TB006-508-02BE, Arrow Price/Stock=https://www.arrow.com/en/products/tb006-508-02be/cui-devices, Datasheet Link=https://www.mouser.com/datasheet/2/670/tb006-508-1550645.pdf, Height=10.4mm, Manufacturer_Part_Number=TB006-508-02BE, Mouser Price/Stock=https://www.mouser.co.uk/ProductDetail/CUI-Devices/TB006-508-02BE?qs=vLWxofP3U2wEdOVV%2FaT04w%3D%3D
J5: "Connector", Manufacturer_Name="TE Connectivity", Mouser Part Number=571-16404560, Arrow Part Number=1-640456-0, Arrow Price/Stock=https://www.arrow.com/en/products/1-640456-0/te-connectivity, Datasheet Link=http://docs-emea.rs-online.com/webdocs/1570/0900766b81570371.pdf, Height=10.414mm, Manufacturer_Part_Number=1-640456-0, Mouser Price/Stock=https://www.mouser.co.uk/ProductDetail/TE-Connectivity-AMP/1-640456-0?qs=%2F35zJ5USjomFMMbv03PGrg%3D%3D, System=Connector
K1: "Relay or Contactor", Manufacturer_Name=Altech, Mouser Part Number=845-RM842012351005, Datasheet Link=https://www.tme.eu/Document/03db36903fbbe089c5f2033cc05648eb/e_RM84.pdf, Height=15.7mm, Manufacturer_Part_Number=RM84-2012-35-1005, Mouser Price/Stock=https://www.mouser.co.uk/ProductDetail/Altech/RM84-2012-35-1005?qs=tIuBKjZQlclfIDxrgB%2FiZw%3D%3D
Q1: "Transistor BJT PNP", Manufacturer_Name=Rectron, Mouser Part Number=583-BC856A-T, Datasheet Link=https://mouser.componentsearchengine.com/Datasheets/1/BC856A-T.pdf, Height=1.15mm, Manufacturer_Part_Number=BC856A-T, Mouser Price/Stock=https://www.mouser.co.uk/ProductDetail/Rectron/BC856A-T?qs=yKhgg%2FY7bu1iKyeKV1oJ6w%3D%3D
Q2 Q8: "Transistor BJT NPN", Manufacturer_Name=Nexperia, Mouser Part Number=N/A, Datasheet Link=https://assets.nexperia.com/documents/data-sheet/BC846_SER.pdf, Height=1.1mm, Manufacturer_Part_Number=BC846, Mouser Price/Stock=https://www.mouser.com/Search/Refine.aspx?Keyword=N%2FA
Q3 Q4 Q9 Q11: "Transistor BJT PNP", Manufacturer_Name="Diodes Inc.", Mouser Part Number=621-MMBT5401-F, Arrow Part Number=MMBT5401-7-F, Arrow Price/Stock=https://www.arrow.com/en/products/mmbt5401-7-f/diodes-incorporated, Datasheet Link=https://www.diodes.com/assets/Datasheets/ds30057.pdf, Height=1.2mm, Manufacturer_Part_Number=MMBT5401-7-F, Mouser Price/Stock=https://www.mouser.co.uk/ProductDetail/Diodes-Incorporated/MMBT5401-7-F?qs=i73nB8jq7%2FziVmdJmjed1Q%3D%3D
Q5 Q12 Q13: "Transistor BJT NPN", Manufacturer_Name="Diodes Inc.", Mouser Part Number=621-MMBT5551-F, Arrow Part Number=MMBT5551-7-F, Arrow Price/Stock=https://www.arrow.com/en/products/mmbt5551-7-f/diodes-incorporated, Datasheet Link=https://componentsearchengine.com/Datasheets/2/MMBT5551-7-F.pdf, Height=1.1mm, Manufacturer_Part_Number=MMBT5551-7-F, Mouser Price/Stock=https://www.mouser.co.uk/ProductDetail/Diodes-Incorporated/MMBT5551-7-F?qs=CHt8fYyHClyETH%252BLCSkJww%3D%3D
Q6 Q7: "Transistor BJT NPN", Manufacturer_Name="Micro Commercial Components (MCC)", Mouser Part Number=N/A, Arrow Part Number=BF422-AP, Arrow Price/Stock=https://www.arrow.com/en/products/bf422-ap/micro-commercial-components, Datasheet Link=https://www.arrow.com/en/products/bf422-ap/micro-commercial-components, Height=4.7mm, Manufacturer_Part_Number=BF422-AP, Mouser Price/Stock=https://www.mouser.co.uk/ProductDetail/Micro-Commercial-Components-MCC/BF422-AP?qs=P1JMDcb91o41C2nx90HEfA%3D%3D
Q10: "Transistor BJT PNP", Manufacturer_Name="Micro Commercial Components (MCC)", Mouser Part Number=N/A, Datasheet Link=https://mccsemi.com/pdf/products/BF421-BF423(TO-92).pdf, Height=4.7mm, Manufacturer_Part_Number=BF423-AP, Mouser Price/Stock=https://www.mouser.co.uk/ProductDetail/Micro-Commercial-Components-MCC/BF423-AP?qs=P1JMDcb91o5SLWHyd3jSDQ%3D%3D
R1 R2 R3 R4 R5 R6 R7 R8 R9 R10 R11 R12 R13 R14 R15 R16 R17 R18 R19 R20 R21 R22 R23 R24 R25 R26 R27 R28 R29 R30 R31 R32 R33 R34 R35 R36 R37 R38 R39 R40 R41 R42 R43 R44 R45 R46 R47 R48 R49 R50 R51 R52 R53 R54 R55 R56 R58 R59 R60: "Resistor SMD", Arrow Part Number=CR1206-FW-1504ELF, Manufacturer_Name=Bourns, Mouser Part Number=652-CR1206FW1504ELF, Arrow Price/Stock=https://www.arrow.com/en/products/cr1206-fw-1504elf/bourns, Datasheet Link=http://componentsearchengine.com/Datasheets/1/CR1206-FW-1504ELF.pdf, Height=0.75mm, Manufacturer_Part_Number=CR1206-FW-1504ELF, Mouser Price/Stock=https://www.mouser.co.uk/ProductDetail/Bourns/CR1206-FW-1504ELF/?qs=6oMev5NRZMFfvXkOpYL2%252BA%3D%3D

## Free pads (board coordinates)
  round 60 hole 125.98: 2(125,2520) 3(125,160) 4(3510,160) 5(3505,2520)

## Via types
v1: diameter 20, hole 10, Top Layer to Bottom Layer, 437 vias

## Nets (pads, with @x,y where several pads share a name; then routed paths per layer and width w, separated by ;. In a path a pad name is that pad's centre, name@x,y a point inside that pad or via, vN(x,y) a via of type N, cw(c..) or ccw(c..) an arc to the next point about the centre after c; other vN are vias at no path point)
+9: C4.1 D2.1 D5.1 IC1.5 IC1.16 IC2.8 K1.A1 Q1.2 R3.2 R7.1 R14.1 R23.2 R30.1 R40.1 R41.2 | length 10231.9
  Layer 1 w15: C4.1 690,1200 775,1115 775,265 750,240 v1(710,240) ; v1(1780,1610) 1780,1790 1850,1860 v1(1920,1860) ; v1(2670,1375) 2735,1310 v1(2735,1000) 2735,998.65 2740,993.65 v1(2740,850)
  Layer 2 w10: 690,1570 710,1550 1683.84,1550 K1.A1@1703.28,1530.55 ; v1(1940,2350) 2390,2350 v1(2430,2310)
  Layer 2 w15: K1.A1@1703.28,1530.55 K1.A1
  Layer 2 w20: v1(1780,1610) C4.1 690,1570 690,1480 780,1390 1210,1390 1225,1375 v1(2670,1375) 2701.18,1343.82 2880,1343.82 3060,1343.82 v1(3133.47,1343.82)
  Bottom Layer w10: v1(1940,2350) 1970,2320 1982.6,2320 ; Q1.2 1982.6,2320 ; IC2.8 2002.28,1910 1964.98,1910 1910,1910 1880,1940 1880,2002.77 1922.6,2045.36 R14.1 1922.6,2182.6 1980,2240 1980,2267.4 R3.2 1982.6,2320 ; IC1.5 2425,2315 v1(2430,2310) 2460,2280 2460,2150 2495,2115 IC1.16
  Bottom Layer w15: R7.1 R7.1@578.7,1708.7 ; v1(710,240) R23.2 ; K1.A1 1730.55,1520 1760.88,1520 1800,1480.88 1800,1423.82 D2.1 ; D2.1@1796.18,1405.24 1796.18,963.82 1820,940 R30.1 ; v1(1920,1860) 1920,1865.02 1964.98,1910 ; R41.2 2490,890 2530,850 v1(2740,850) ; v1(2735,1000) 2735,1001.35 2745,1011.35 R40.1 ; D5.1 3135.11,1291.29 3135.11,1342.18 v1(3133.47,1343.82)
  Bottom Layer w20: R7.1 670,1710 690,1690 C4.1
+50: C6.1 Q5.3 Q7.2 R4.1 R11.1 | length 2276
  Layer 1 w20: v1(1240,2000) v1(1240,1460) 1240,1158.43 Q7.2
  Layer 2 w20: C6.1 723.62,2063.62 1176.38,2063.62 v1(1240,2000) ; v1(850,1460) v1(1240,1460)
  Bottom Layer w20: R11.1 592.77,2094.63 625.37,2094.63 C6.1 ; v1(850,1460) 917.4,1460 R4.1 ; Q5.3 1282.17,1090 1315.51,1056.65 1341.77,1056.65 Q7.2
-9: C5.2 D6.2 IC2.4 R10.1 R37.1 R42.2 R59.2 | length 5007.9
  Layer 1 w15: v1(330,990) 510,1170 510,1760 v1(590,1840)
  Layer 2 w20: v1(1792.72,2120) 1530,2120 1200,1790 C5.2 1140,1720 2370,1720 v1(2410,1680) 2445,1715 v1(3130,1715)
  Bottom Layer w15: R37.1 320,973.24 330,983.24 v1(330,990) ; R10.1 588.7,1908.7 588.7,1841.3 v1(590,1840)
  Bottom Layer w20: R10.1 950,1910 C5.2 ; IC2.4 v1(1792.72,2120) ; R42.2 v1(2410,1680) ; R59.2 3098.82,1642.4 3107.03,1650.61 3121.79,1650.61 D6.2 v1(3130,1715)
-50: C7.2 Q10.2 Q11.3 R12.1 R44.1 | length 3193.9
  Layer 1 w15: v1(1176.3,380) 1270,473.7 1270,670 Q10.2
  Layer 1 w20: Q10.2 1360,750 1440,830 v1(1440,2280)
  Layer 2 w20: C7.2 1310,2410 v1(1440,2280)
  Bottom Layer w20: R12.1 970,2310 C7.2 ; v1(1176.3,380) R44.1 ; Q11.3 Q10.2
\BODY_OV: J5.6 R20.1 R27.2 | length 2221.6
  Layer 1 w10: J5.6 v1(2830,1870)
  Layer 2 w10: v1(2340,1870) v1(2830,1870)
  Bottom Layer w10: R27.2 R20.1 ; R27.2@2333.05,1938.71 2336.3,1935.47 2336.3,1873.7 v1(2340,1870)
AMP_SW1: IC4.1 J5.2 | length 1152
  Layer 1 w10: v1(2335,1240) 2360,1215 2360,420 2430,350 J5.2
  Bottom Layer w10: IC4.1 2255,1265 2280,1240 v1(2335,1240)
AMP_SW2: IC4.8 J5.3 | length 1099.1
  Layer 1 w10: J5.3 2530,314.81 2510,334.81 2510,1180 v1(2610,1280)
  Bottom Layer w10: IC4.8 2607.5,1344.78 2607.5,1282.5 v1(2610,1280)
AMP_SW3: IC4.9 J5.4 | length 892.7
  Layer 1 w10: J5.4 2630,1090 v1(2660,1120)
  Bottom Layer w10: IC4.9 2639.17,1132.72 2651.88,1120 v1(2660,1120)
AMP_SW4: IC4.16 J5.5 | length 1499.1
  Layer 1 w10: v1(2210,230) v1(2210,1080)
  Layer 2 w10: v1(2210,230) 2700,230 2730,260 J5.5
  Bottom Layer w10: v1(2210,1080) 2215.74,1085.74 2224.76,1085.74 2255,1115.98 IC4.16
BODY_V_SENS: IC2.3 R21.1 R45.1 | length 190.2
  Bottom Layer w15: R21.1 1707.4,2022.19 1719.59,2010 1787.72,2010 IC2.3
GND: C1.2 C3.1 C4.2 C5.1 C6.2 C7.1 C8.2 C9.2 C10.2 C16.1 C17.1 C18.2 C19.2 C20.2 C21.1 C22.1 C23.2 C26.2 C27.2 C29.2 IC1.7 IC1.8 IC1.11 IC1.15 IC4.5 J1.2 J1.4 J1.6 J1.8 J2.2 J3.1 J4.2 J5.1 pad.2 pad.3 pad.4 pad.5 Q2.2 Q8.2 R1.1 R9.2 R15.1 R17.2 R19.2 R21.2 R24.2 R27.1 R32.2 R36.1 R38.2 R55.1 R56.1 R58.1 R60.1 | length 14.1
  Bottom Layer w15: R56.1@3320,1554.49 R56.1
  other v1: 200,100 300,100 400,100 500,100 600,100 700,100 800,100 900,100 1000,100 1100,100 1200,100 1300,100 1400,100 1500,100 1600,100 1700,100 1800,100 1900,100 2000,100 2100,100 2200,100 2300,100 2400,100 2500,100 2600,100 2700,100 2800,100 2900,100 3000,100 3100,100 3200,100 3300,100 3400,100 250,200 350,200 450,200 550,200 650,200 750,200 850,200 1050,200 1150,200 1250,200 1350,200 1450,200 1550,200 1650,200 1750,200 1850,200 1950,200 2050,200 2150,200 2750,200 2850,200 2950,200 3050,200 3150,200 3250,200 3350,200 100,300 200,300 300,300 400,300 500,300 802.5,300 1200,300 1700,300 1800,300 1900,300 2000,300 2100,300 3300,300 3400,300 3500,300 150,400 250,400 350,400 450,400 1750,400 1850,400 1950,400 2050,400 2150,400 2250,400 2450,400 2550,400 2750,400 3350,400 3450,400 3550,400 100,500 200,500 300,500 802.5,500 3300,500 3400,500 3500,500 1550,600 1650,600 1850,600 1950,600 3150,600 3350,600 3450,600 3550,600 3092.32,692.32 100,700 300,700 1400,700 2100,700 2300,700 2400,700 2700,700 3000,700 3400,700 3500,700 150,800 250,800 1650,800 1950,800 2150,800 2950,800 3045,800 3150,800 3550,800 100,900 200,900 802.5,900 1500,900 1600,900 1900,900 2100,900 2700,900 3000,900 3100,900 3500,900 2785,905 2410,915 2785,975 2940,990 150,1000 250,1000 450,1000 747.5,1000 850,1000 950,1000 1550,1000 1650,1000 1850,1000 1950,1000 2050,1000 2150,1000 3250,1000 3450,1000 3550,1000 2690,1065 3175,1085 100,1100 200,1100 300,1100 600,1100 700,1100 802.5,1100 1600,1100 1700,1100 1900,1100 2000,1100 2100,1100 3300,1100 3500,1100 150,1200 250,1200 350,1200 450,1200 650,1200 750,1200 850,1200 1550,1200 1650,1200 1750,1200 1850,1200 1950,1200 2050,1200 2150,1200 2290,1200 2650,1200 3250,1200 3350,1200 3450,1200 3550,1200 2415,1240 2204.15,1264.18 2540,1265 100,1300 200,1300 300,1300 400,1300 717.5,1300 900,1300 1500,1300 1600,1300 1700,1300 1900,1300 2000,1300 2100,1300 3300,1300 3500,1300 2665,1318.41 2940,1385 3060,1385 150,1400 250,1400 350,1400 450,1400 650,1400 2665,1430 100,1500 200,1500 300,1500 400,1500 1500,1500 1600,1500 1900,1500 2100,1500 3055,1510 2325,1560 1000,1580 150,1600 250,1600 350,1600 450,1600 550,1600 1850,1600 1950,1600 2150,1600 3150,1600 3250,1600 2290,1650 2785,1670 100,1700 200,1700 800,1700 900,1700 1000,1700 1100,1700 3200,1700 3300,1700 3400,1700 3500,1700 150,1800 250,1800 450,1800 750,1800 850,1800 950,1800 1350,1800 1550,1800 1650,1800 1850,1800 1950,1800 2750,1800 2950,1800 3050,1800 3150,1800 3250,1800 3350,1800 3450,1800 3550,1800 100,1900 200,1900 1100,1900 1500,1900 3000,1900 3100,1900 3200,1900 3300,1900 3400,1900 3500,1900 150,2000 250,2000 450,2000 550,2000 750,2000 850,2000 950,2000 1150,2000 1350,2000 1550,2000 2750,2000 2850,2000 2950,2000 3050,2000 3150,2000 3250,2000 3350,2000 3450,2000 3550,2000 100,2100 200,2100 700,2100 1200,2100 1300,2100 3500,2100 150,2200 250,2200 450,2200 550,2200 750,2200 850,2200 950,2200 1150,2200 1250,2200 1350,2200 1550,2200 1650,2200 1750,2200 2050,2200 2750,2200 2950,2200 3050,2200 3150,2200 3250,2200 3350,2200 3450,2200 3550,2200 100,2300 200,2300 1100,2300 1200,2300 1300,2300 1500,2300 1600,2300 2200,2300 2700,2300 2800,2300 2900,2300 3000,2300 3100,2300 3200,2300 3300,2300 3500,2300 150,2400 250,2400 450,2400 550,2400 650,2400 750,2400 850,2400 950,2400 1450,2400 1550,2400 2650,2400 2750,2400 2850,2400 2950,2400 3050,2400 3150,2400 3250,2400 3350,2400 3450,2400 3550,2400 300,2500 400,2500 500,2500 600,2500 700,2500 800,2500 900,2500 1000,2500 1100,2500 1200,2500 1300,2500 1400,2500 1500,2500 1600,2500 1700,2500 1800,2500 1900,2500 2000,2500 2500,2500 2700,2500 2800,2500 2900,2500 3000,2500 3100,2500 3200,2500 3300,2500 3400,2500
IOUT_SENS: C28.1 IC5.7 J5.10 R52.1 | length 1130.5
  Layer 1 w10: v1(3070,1060) 3070,750 3230,590 J5.10
  Bottom Layer w10: IC5.7 2957.2,1223.13 2990,1190.33 C28.1 3000,1152.28 3000,1140.86 3005.86,1135 3064.14,1135 3070,1129.14 R52.1 v1(3070,1060)
NetC1_1: C1.1 C2.2 C3.2 R4.2 R5.2 R6.2 | length 1301.3
  Bottom Layer w15: C1.1 770,1508.61 798.79,1537.4 R4.2 920,1621.21 928.79,1630 1071.21,1630 1080,1621.21 1080,1546.26 1088.86,1537.4 1132.6,1537.4 1160,1510 R5.2 1210,1390 1220,1380 1220,1290 ; C2.2 1190,1200 1220,1230 1220,1290 ; C3.2 1220,1290
NetC2_1: C2.1 Q3.1 Q3.3 Q4.1 R15.2 | length 403.7
  Bottom Layer w15: C2.1 946.17,1206.17 976.45,1206.17 1002.6,1232.32 Q4.1 1006.91,1241.56 1006.91,1264.74 1040,1297.83 Q3.3 1040,1307.68 1000,1347.68 R15.2 Q3.1@1000,1397.24
NetC8_1: C8.1 IC2.6 R13.2 R17.1 | length 247.2
  Bottom Layer w10: IC2.6 2086.3,2005 2091.3,2010 ; C8.1 2090,1970 R17.1@2091.3,1971.3
  Bottom Layer w15: R13.2 2091.3,2048.7 2091.3,2010 R17.1@2091.3,1971.3
NetC9_1: C9.1 R28.2 | length 72.6
  Bottom Layer w15: R28.2 C9.1
NetC10_1: C10.1 IC3.7 R23.1 | length 172.4
  Bottom Layer w15: IC3.7 C10.1 612.28,380 677.4,380 700,357.4 R23.1@710.71,357.4
NetC11_1: C11.1 Q9.2 R24.1 | length 202.8
  Bottom Layer w15: C11.1 890,498.54 921.14,467.4 R24.1 935.69,473.09 1008.44,473.09 Q9.2
NetC11_2: C11.2 K1.21 Q7.1 Q10.1 R22.2 R26.2 R29.1 R34.2 | length 1939.6
  Layer 2 w20: C11.2 938.43,710 1110,710 1248.43,848.43 Q10.1 1976.57,848.43 2010,815 2010,748.43 K1.21
  Bottom Layer w20: R26.2 R22.2 826.38,694.8 C11.2 ; R34.2 1461.14,787.4 1408.34,840.2 1358.23,840.2 Q10.1 Q7.1 1407.4,950 1451.46,994.06 1451.46,1002.91 1461.14,1012.6 R29.1
NetC12_1: C12.1 C15.1 IC3.2 R26.1 R28.1 R33.2 | length 518.7
  Bottom Layer w15: C12.1@656.71,560.38 607.02,560.38 R33.2 600,572.6 600,610 582.28,627.72 C15.1 582.28,728.58 IC3.2 610,801.21 618.79,810 671.21,810 680,818.79 R28.1 ; R26.1 660,560.38 667.72,552.66 C12.1
NetC12_2: C12.2 R22.1 | length 88.4
  Bottom Layer w15: C12.2 732.28,607.81 744.47,620 R22.1@747.81,620
NetC13_1: C13.1 D4.1 Q11.1 Q12.3 | length 990.4
  Layer 1 w15: C13.1 870,871.35 1095,646.35 v1(1095,645)
  Bottom Layer w10: D4.1 1156.18,693.82 1230,620 1290,620 1320,590 1360,590 1387.94,562.06 Q12.3
  Bottom Layer w15: v1(1095,645) 1095,646.35 1100,651.35 D4.1 1108.77,702.59 1108.77,732.14 1150,773.36 1150,781.21 1158.79,790 1269.72,790 Q11.1@1272.32,787.4
NetC13_2: C13.2 Q4.3 Q5.1 Q6.2 R18.2 | length 784.3
  Bottom Layer w15: C13.2 1060,1070 ; Q4.3 1040,1090 1060,1070 ; Q6.2 1092.6,892.6 1187.4,892.6 R18.2 ; Q5.1 1177.83,1052.2 1160.04,1070 1060,1070
  Bottom Layer w20: Q5.1 1191.46,1049.41 1210.59,1049.41 1270,990 1270,906.91 1258.28,895.2 R18.2
NetC14_1: C14.1 R33.1 | length 114
  Bottom Layer w15: C14.1 448.23,620 459.24,609 459.24,590.76 469.55,580.45 512.15,580.45 R33.1
NetC14_2: C14.2 C15.2 IC3.6 R31.2 | length 1127.8
  Layer 2 w15: IC3.6 510,450 560,500 740,500 v1(1000,240)
  Bottom Layer w15: IC3.6 380,573.7 380,670 394.57,684.57 C14.2 506.71,684.57 517.72,673.56 C15.2 ; R31.2 931.3,241.3 998.7,241.3 v1(1000,240)
NetC16_2: C16.2 IC3.4 R37.2 | length 225.5
  Bottom Layer w15: R37.2 322.44,830.16 400.16,830.16 C16.2@410,820.32 ; IC3.4@404.36,761.94 IC3.4 C16.2@410,820.32 ; IC3.4@410,761.94 C16.2@410,820.32
NetC17_2: C17.2 IC3.3 J2.1 R36.2 | length 542.1
  Layer 2 w15: J2.1 333.7,580 IC3.3
  Bottom Layer w15: IC3.3 C17.2 ; C17.2@520,827.72 577.72,827.72 590,840 R36.2
NetC18_1: C18.1 IC4.4 R42.1 | length 203.4
  Bottom Layer w10: C18.1 2334.88,1452.6 R42.1@2409.69,1452.6 ; R42.1@2395,1437.91 R42.1@2409.69,1452.6 ; IC4.4 R42.1@2405,1447.91 ; R42.1 R42.1@2409.69,1452.6
NetC19_1: C19.1 IC4.13 R41.1 | length 184.6
  Bottom Layer w10: IC4.13 2405,1037.28 C19.1 2484.88,1032.28 R41.1
NetC20_1: C20.1 C26.1 IC5.8 R40.2 | length 300.9
  Bottom Layer w10: R40.2 2820.12,1157.4 C26.1 2829.88,1157.4 2895.12,1157.4 C20.1 2909.65,1162.28 2931.61,1184.25 2931.61,1210 IC5.8
NetC21_2: C21.2 C22.2 Q13.2 R39.1 R43.1 R44.2 | length 715
  Bottom Layer w15: Q13.2 1240.62,470.24 1240.62,455.64 1307.4,388.86 R44.2 1310,377.4 R44.2@1310,368.54 ; C21.2 1461.27,260 1441.27,280 1310,280 R44.2@1310,368.54 ; R39.1 R43.1 1468.02,325.86 1462.17,320 1358.54,320 R44.2@1310,368.54
NetC23_1: C23.1 IC4.2 IC4.6 IC4.11 IC4.14 R46.1 | length 1088.9
  Layer 1 w10: v1(2500,1420) 2526.38,1446.38 2526.38,1616.38 C23.1
  Bottom Layer w10: IC4.2 2305,1295 2320,1280 2490,1280 2500,1290 2500,1342.28 IC4.6 ; IC4.14 2355,1194.14 2360.86,1200 2499.14,1200 2505,1194.14 ; R46.1 2505,1447.6 IC4.6 ; IC4.11 2505,1194.14 ; 2505,1194.14 IC4.6
NetC24_1: C24.1 IC5.2 R51.2 | length 419.9
  Bottom Layer w10: R51.2 2670.12,1607.28 C24.1 2797.72,1607.28 2815,1590 2815,1530.86 2820.86,1525 2949.61,1525 2954.61,1520 2955.47,1519.14 2955.47,1458.35 IC5.2
NetC24_2: C24.2 IC5.1 R46.2 R47.2 R48.2 R49.2 R50.2 R51.1 R53.1 | length 2023.5
  Layer 1 w15: v1(2240,1590) 2240,1190 2300,1130 v1(2300,890)
  Layer 2 w15: v1(2240,1590) v1(2500,1590) ; v1(2300,890) 2301.29,890 2321.29,870 2548.71,870 2568.71,890 v1(2570,890)
  Bottom Layer w15: v1(2240,1590) 2240,1583.24 2250,1573.24 R50.2 ; v1(2300,890) R49.2 ; v1(2500,1590) R46.2 R48.2 2631.04,1527.4 2648.69,1545.05 2657.55,1545.05 R51.1 2675.06,1537.66 2749.94,1537.66 C24.2 2764.65,1542.72 2775.65,1531.71 2775.65,1524.35 2818.96,1481.04 2818.96,1469.59 2831.14,1457.4 2930.83,1457.4 IC5.1 ; v1(2570,890) R47.2
NetC25_1: C25.1 IC5.6 R52.2 | length 447
  Bottom Layer w10: C25.1 2842.28,1260 2884.14,1260 2890,1265.86 2890,1320 2910,1340 2976.94,1340 2982.8,1334.14 IC5.6 2982.8,1232.2 2990,1225 3055,1225 3065,1215 3065,1177.4 R52.2
NetC25_2: C25.2 C28.2 R53.2 R55.2 | length 741.1
  Layer 1 w10: v1(2775,1280) 2790,1265 v1(2790,1035)
  Layer 2 w10: v1(2790,1035) 2982.29,1035 2987.29,1040 v1(2990,1040)
  Bottom Layer w10: R55.2 2753.86,1342.6 R55.2@2758.86,1337.6 ; v1(2775,1280) 2775,1312.6 2768.54,1319.06 2768.54,1327.91 R55.2@2758.86,1337.6 ; R53.2 C25.2 2837.52,1319.8 2786.65,1319.8 2768.86,1337.6 R55.2@2758.86,1337.6 ; v1(2990,1040) C28.2
NetC27_1: C27.1 C29.1 IC5.4 R59.1 | length 318.7
  Bottom Layer w10: C29.1 2888.5,1596.22 2936.5,1596.22 C27.1 C27.1@2959.65,1582.72 ; IC5.4 3008.39,1504.65 2993.03,1520 2973.15,1539.88 2973.15,1569.21 C27.1@2959.65,1582.72 ; R59.1 3015.31,1582.28 2960.08,1582.28 C27.1@2959.65,1582.72
NetD1_1: D1.1 R13.1 | length 748.7
  Layer 2 w10: v1(1620,1930) 1685,1995 2155,1995 v1(2210,2050)
  Bottom Layer w10: D1.1 v1(1620,1930) ; R13.1 v1(2210,2050)
NetD1_2: D1.2 IC2.1 IC2.2 | length 152.4
  Bottom Layer w10: D1.2 1703.82,1935.39 1723.43,1955 IC2.2 IC2.1
NetD2_2: D2.2 K1.A2 Q8.3 | length 1210.7
  Layer 1 w10: K1.A2 2015.28,1779.86 2040,1804.59 v1(2040,1810)
  Layer 2 w10: v1(2040,1810) v1(2670,1810)
  Bottom Layer w10: D2.2 1957.47,1433.65 1957.47,1472.75 K1.A2 ; Q8.3 2660,1825.41 2670,1815.41 v1(2670,1810)
NetD3_1: D3.1 D4.2 | length 110
  Bottom Layer w20: D3.1 D4.2
NetD3_2: D3.2 Q6.1 R25.1 | length 267.7
  Bottom Layer w20: D3.2 990,770 ; R25.1 990,770 ; Q6.1 1011.57,791.57 990,770
NetD5_2: D5.2 D6.1 IC5.3 R54.2 | length 381.3
  Bottom Layer w10: IC5.3 2982.8,1407.2 2990.86,1399.14 3025.91,1399.14 3060.58,1433.82 D5.2 D6.1 ; D6.1@3131.42,1512.6 3217.6,1512.6 R54.2
NetIC1_1: IC1.1 IC1.14 | length 711
  Layer 2 w10: v1(2220,2147.5) 2587.5,2147.5 v1(2660,2220)
  Bottom Layer w10: v1(2220,2147.5) 2252.5,2115 IC1.1 ; IC1.14 2559.78,2217.5 2657.5,2217.5 v1(2660,2220)
NetIC1_2: IC1.2 R16.2 R20.2 | length 267.7
  Bottom Layer w10: IC1.2 2404.14,2165 2410,2159.14 R20.2@2410,2030 ; R20.2@2410,2032.6 R20.2 R16.2
NetIC1_3: IC1.3 IC2.7 | length 758.3
  Layer 1 w10: v1(2260,2210) 2260,2201.88 2270,2191.88 v1(2270,1960)
  Layer 2 w10: v1(1930,1960) v1(2270,1960)
  Bottom Layer w10: v1(1930,1960) 1932.5,1957.5 2004.78,1957.5 IC2.7 ; v1(2260,2210) 2262.5,2212.5 2340.22,2212.5 IC1.3
NetIC1_4: IC1.4 Q1.3 R1.2 | length 698.9
  Bottom Layer w10: R1.2 1855.91,2443.31 Q1.3 2020,2453.15 2026.81,2459.96 2036.65,2459.96 2056.69,2480 2220,2480 2250,2450 2250,2290 2275,2265 IC1.4
NetIC1_6: IC1.6 IC1.9 | length 256
  Bottom Layer w10: IC1.6 2415,2365 2515,2465 IC1.9
NetIC1_10: IC1.10 IC1.12 | length 221.1
  Bottom Layer w15: IC1.12 2552.28,2310 2510,2310 2490,2330 2490,2400 2505,2415 IC1.10
NetIC2_5: IC2.5 R14.2 R19.1 | length 164.3
  Bottom Layer w10: IC2.5 2007.28,2130.12 R14.2 R19.1
NetIC4_3: IC4.3 R50.1 | length 200.9
  Bottom Layer w10: R50.1 2250,1405.86 2255.86,1400 2349.14,1400 2355,1394.14 IC4.3
NetIC4_7: IC4.7 R48.1 | length 120.9
  Bottom Layer w10: IC4.7 2555,1427.6 2556.46,1429.06 2556.46,1437.91 2571.14,1452.6 R48.1
NetIC4_10: IC4.10 R47.1 | length 118.6
  Bottom Layer w10: R47.1@2550,1027.4 R47.1@2555,1032.4 ; IC4.10 2555,1085 2570,1070 R47.1
NetIC4_15: IC4.15 R49.1 | length 107.4
  Bottom Layer w10: R49.1 2305,1032.4 IC4.15
NetIC5_5: IC5.5 R58.2 | length 231.4
  Bottom Layer w10: IC5.5 3008.39,1264.68 3012.24,1260.83 3039.17,1260.83 3058,1242 3060,1242 3133,1242 3155,1220 R58.2
NetJ1_1: J1.1 R7.2 | length 162.6
  Bottom Layer w20: J1.1 R7.2
NetJ1_3: J1.3 R10.2 | length 172.6
  Bottom Layer w20: J1.3 R10.2
NetJ1_5: J1.5 R11.2 | length 176.7
  Bottom Layer w20: J1.5 345,2105 507.6,2105 R11.2
NetJ1_7: J1.7 R12.2 | length 165.2
  Bottom Layer w20: J1.7 R12.2
NetJ3_2: J3.2 K1.24 R35.1 | length 2374.4
  Layer 2 w20: K1.24 2015.28,561.66 2034.14,580.53 2034.14,584.14 2080,630 3100,630 3300,830 3300,950 J3.2
  Bottom Layer w10: R35.1 3138.86,467.4 3148.54,477.09 3148.54,485.94 3300,637.4 3300,950 J3.2
NetJ3_3: J3.3 R54.1 R56.2 R60.2 | length 523.2
  Bottom Layer w10: R54.1 3222.4,1442.6 3392.28,1442.6 3405,1429.88 3405,1355.51 3405,1255 J3.3
  Bottom Layer w40: R56.2 3405,1355.51 R60.2
NetJ4_1: J4.1 R45.2 | length 1925.7
  Layer 2 w10: v1(1570,2050) 1890,2050 1940,2100 3390,2100 J4.1
  Bottom Layer w15: v1(1570,2050) 1570.41,2050 1590.41,2030 R45.2
NetK1_11: K1.11 R30.2 | length 100.2
  Bottom Layer w20: K1.11 1720.28,742.87 1819.72,742.87 R30.2
NetQ1_1: Q1.1 R2.2 R3.1 | length 171.7
  Bottom Layer w10: R3.1 Q1.1 2134.09,2356.69 R2.2
NetQ2_1: Q2.1 R8.2 R9.1 | length 151.9
  Bottom Layer w10: Q2.1 R9.1 R8.2
NetQ2_3: Q2.3 R2.1 | length 451.2
  Bottom Layer w10: Q2.3 1766.69,2443.31 1807.28,2402.72 2096.46,2402.72 2131.14,2437.4 R2.1
NetQ3_2: Q3.2 R6.1 | length 66.4
  Bottom Layer w15: Q3.2 1077.4,1460 R6.1
NetQ4_2: Q4.2 R5.1 | length 117.8
  Bottom Layer w15: Q4.2 1077.4,1242.17 1081.71,1246.48 1082.42,1246.48 1151.14,1315.2 R5.1
NetQ5_2: Q5.2 Q7.3 R29.2 | length 318.4
  Bottom Layer w20: Q5.2 1199.49,1127.8 1202.28,1130.59 1202.28,1138.28 1210.85,1146.85 Q7.3 1358.23,1138.62 1409.92,1138.62 1461.14,1087.4 R29.2
NetQ6_3: Q6.3 R18.1 R25.2 | length 232.9
  Bottom Layer w20: R25.2 998.86,927.4 1051.66,980.2 1081.77,980.2 Q6.3 1162.72,988.43 1181.14,970 R18.1
NetQ8_1: Q8.1 R16.1 | length 80.7
  Bottom Layer w10: R16.1 2560.71,2043.31 Q8.1
NetQ9_1: Q9.1 R31.1 | length 156.1
  Bottom Layer w15: R31.1 992.48,317.4 1012.76,337.68 Q9.1
NetQ9_3: Q9.3 Q12.1 Q13.3 R39.2 | length 721.9
  Bottom Layer w10: Q9.3 1107.48,440.24 1140.72,440.24 1170.72,470.24 1170.72,520.24 1210.72,560.24 1270.14,560.24 Q13.3 1271.72,559.62 1331.34,559.62 1370.72,520.24 1453.78,520.24 1461.88,512.14 1461.88,483.71 Q12.1
  Bottom Layer w15: Q12.1 1581.14,479.38 1625.43,435.1 R39.2
NetQ10_3: Q10.3 Q11.2 R34.1 | length 268.3
  Bottom Layer w20: Q11.2 1282.17,712.6 1343.19,651.57 Q10.3 1451.57,651.57 1470,670 R34.1
NetQ12_2: Q12.2 Q13.1 R43.2 | length 182.5
  Bottom Layer w15: Q13.1@1309.09,478.71 Q12.2@1389.95,478.71 ; R43.2@1391.92,380.68 Q12.2@1391.92,476.74
  Bottom Layer w20: Q13.1 Q13.1@1309.09,478.71 ; Q12.2@1389.95,478.71 Q12.2@1391.92,476.74 ; R43.2@1391.92,380.68 R43.2
OUT_EN: J5.7 R8.1 | length 3164.2
  Layer 1 w10: v1(2890,2220) 2890,420 2930,380 J5.7
  Layer 2 w10: v1(1840,2170) 1930,2260 2850,2260 v1(2890,2220)
  Bottom Layer w10: v1(1840,2170) 1897.4,2227.4 R8.1
RELAY_STATUS: J5.8 K1.14 R32.1 | length 1555.2
  Layer 2 w20: K1.14 1806.3,460 2960,460 3030,390 J5.8
  Bottom Layer w20: K1.14 1720.55,546.85 1809.45,546.85 R32.1
VOUT_SENS: J5.9 R35.2 R38.1 | length 182.6
  Bottom Layer w20: R38.1 R35.2 J5.9
pads on no net: IC1.13 IC3.1 IC3.5 IC3.8 IC4.12 K1.12 K1.22

## Polygon pours and split planes (outlines as drawn)
GND on Top Layer "GND_L01_P000" (solid, pour order 0): 0,2630 3630,2630 3630,0 0,0
GND on Bottom Layer "GND_L04_P002" (solid, pour order 2): 0,2630 3630,2630 3630,0 0,0
GND on Layer 1 "GND_L02_P001" (solid, pour order 1): 0,2630 3630,2630 3630,0 0,0
GND on Layer 2 "GND_L03_P003" (solid, pour order 3): 0,2630 3630,2630 3630,0 0,0

## Other copper
Top Layer:
  pour cut-out: 3040,1040 3210,1040 3210,1290 3215,1290 3215,1035 3040,1035 2800,795 2275,795 2175,895 2175,1100 2175,1575 2355,1755 3235,1755 3235,1640 3230,1640 3230,1750 2355,1750 2180,1575 2180,895 2275,800 2800,800
Layer 1:
  pour cut-out: 3040,1040 3210,1040 3210,1290 3215,1290 3215,1035 3040,1035 2800,795 2275,795 2175,895 2175,1100 2175,1575 2355,1755 3235,1755 3235,1640 3230,1640 3230,1750 2355,1750 2180,1575 2180,895 2275,800 2800,800
Layer 2:
  pour cut-out: 3040,1040 3210,1040 3210,1290 3215,1290 3215,1035 3040,1035 2800,795 2275,795 2175,895 2175,1100 2175,1575 2355,1755 3235,1755 3235,1640 3230,1640 3230,1750 2355,1750 2180,1575 2180,895 2275,800 2800,800
Bottom Layer:
  pour cut-out: 3040,1040 3210,1040 3210,1290 3215,1290 3215,1035 3040,1035 2800,795 2275,795 2175,895 2175,1100 2175,1575 2355,1755 3235,1755 3235,1640 3230,1640 3230,1750 2355,1750 2180,1575 2180,895 2275,800 2800,800

## Text inside footprints (layer, text, board x,y; h text height)
C1: Top Overlay "+" at 870,1300 h59.06
C4: Top Overlay "+" at 570,1520 h59.06 r270
C5: Top Overlay "+" at 990,2070 h59.06 r90
C6: Top Overlay "+" at 560,1950 h59.06 r270
C7: Top Overlay "+" at 1160,2130 h59.06 r270
C9: Top Overlay "+" at 740,990 h59.06
C21: Top Overlay "+" at 1710,240 h59.06
C23: Top Overlay "+" at 2605,1565 h59.06